# Altium PCB PCB1.PcbDoc
Units mm, origin at the board's own origin, x right, y up, seen from the top; angles counter-clockwise.
Board outline 42.8 x 28.32 mm, 2 copper layers (Top Layer, Bottom Layer); 17 components, 13 nets, 114 pads, 11 vias.
Unrouted connection lines stored in the file: 14.
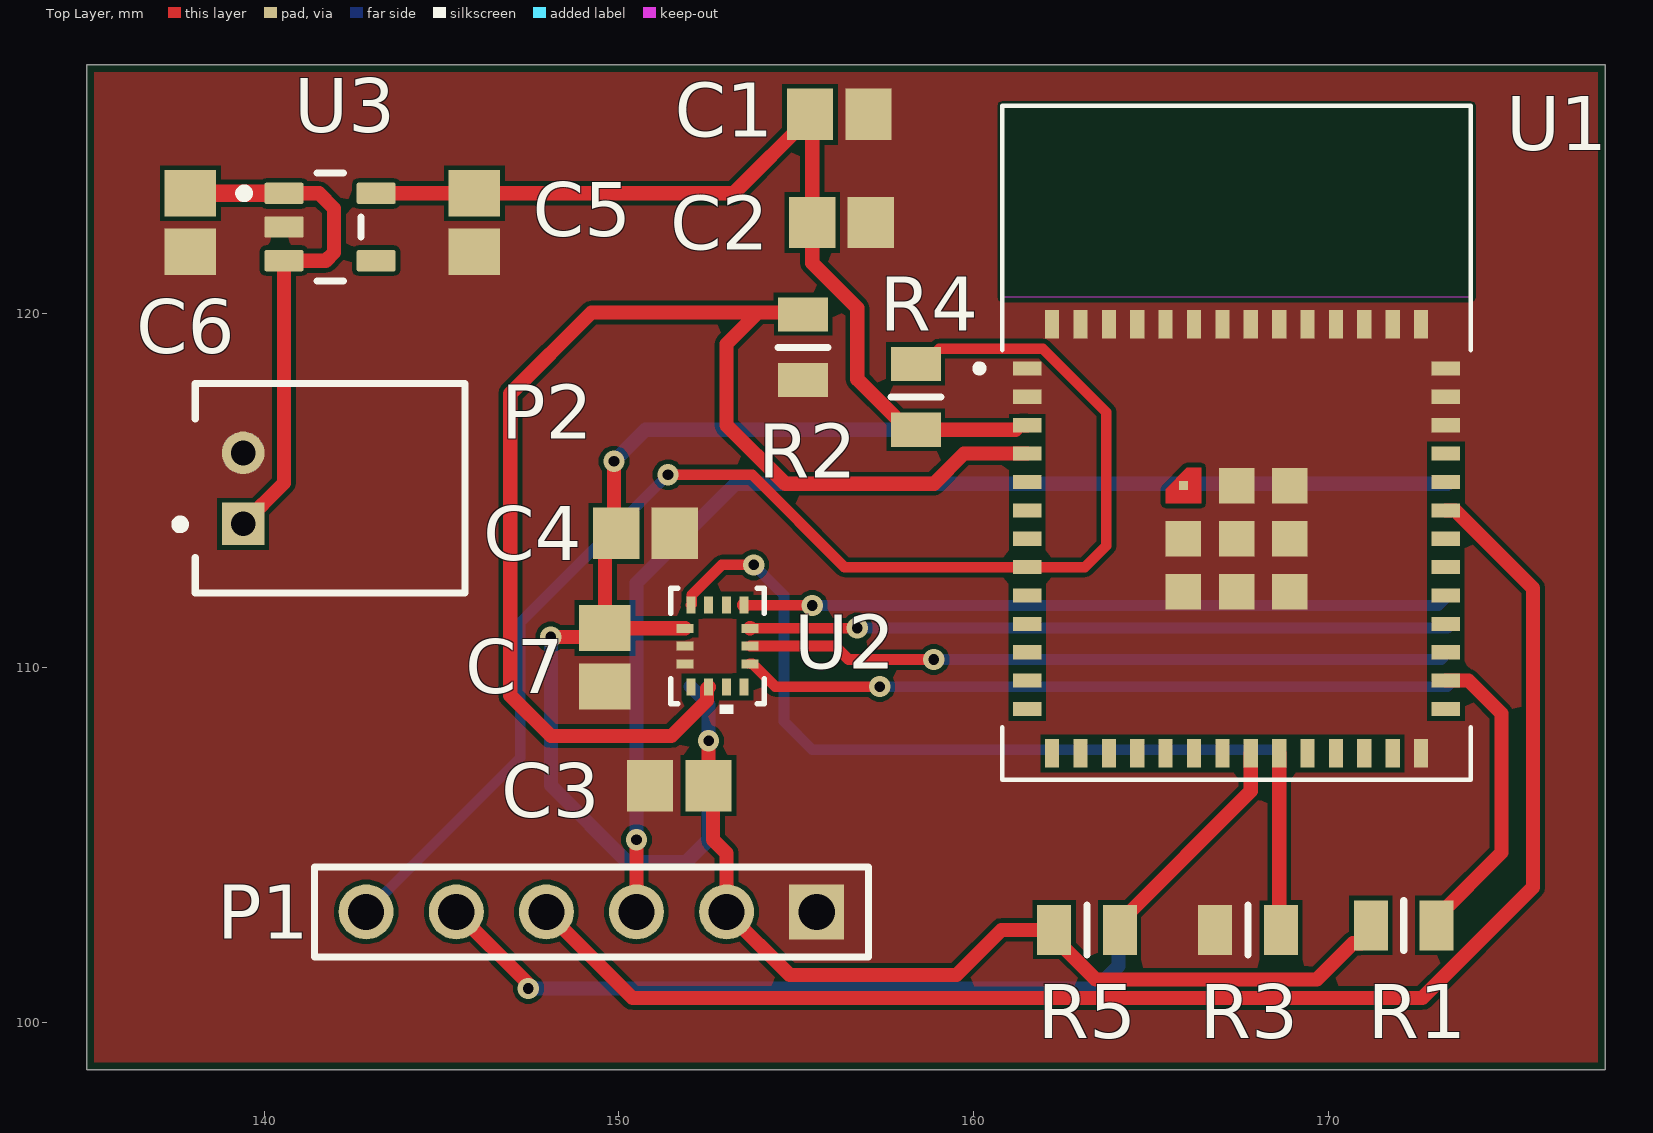
[diagram p0: Top Layer view]
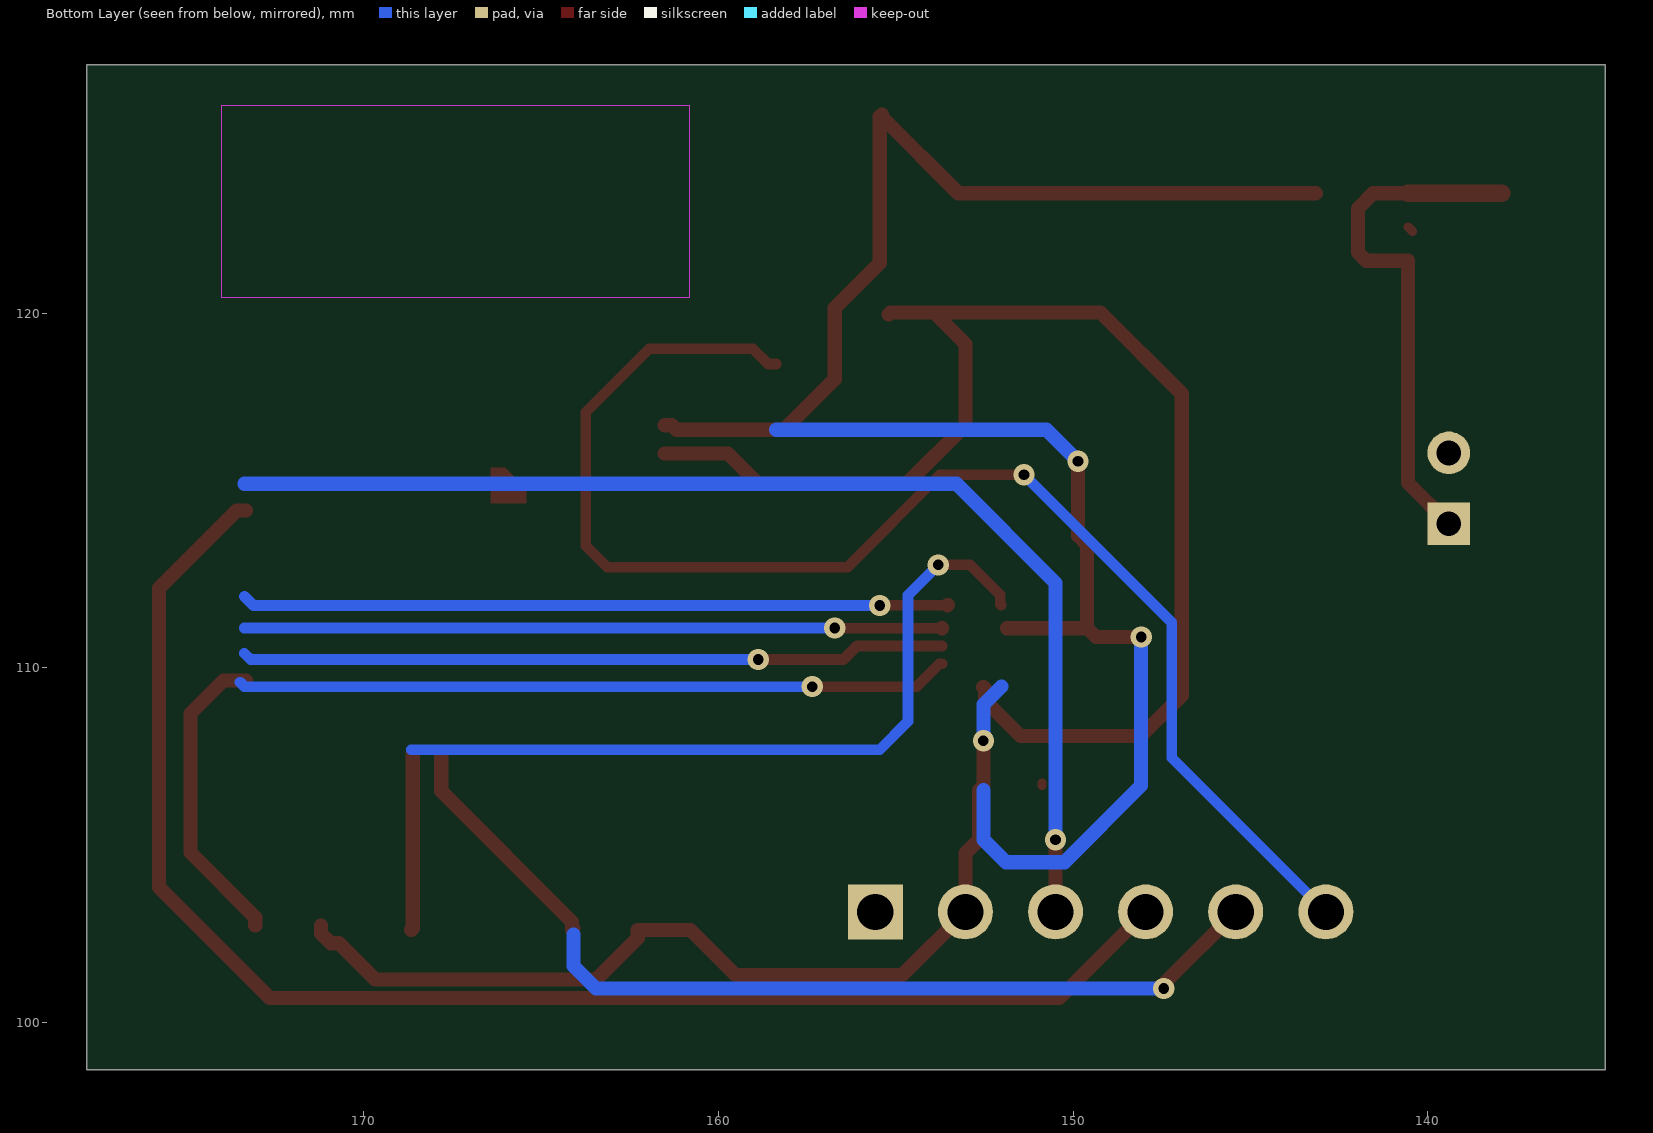
[diagram p1: Bottom Layer view, seen from below]
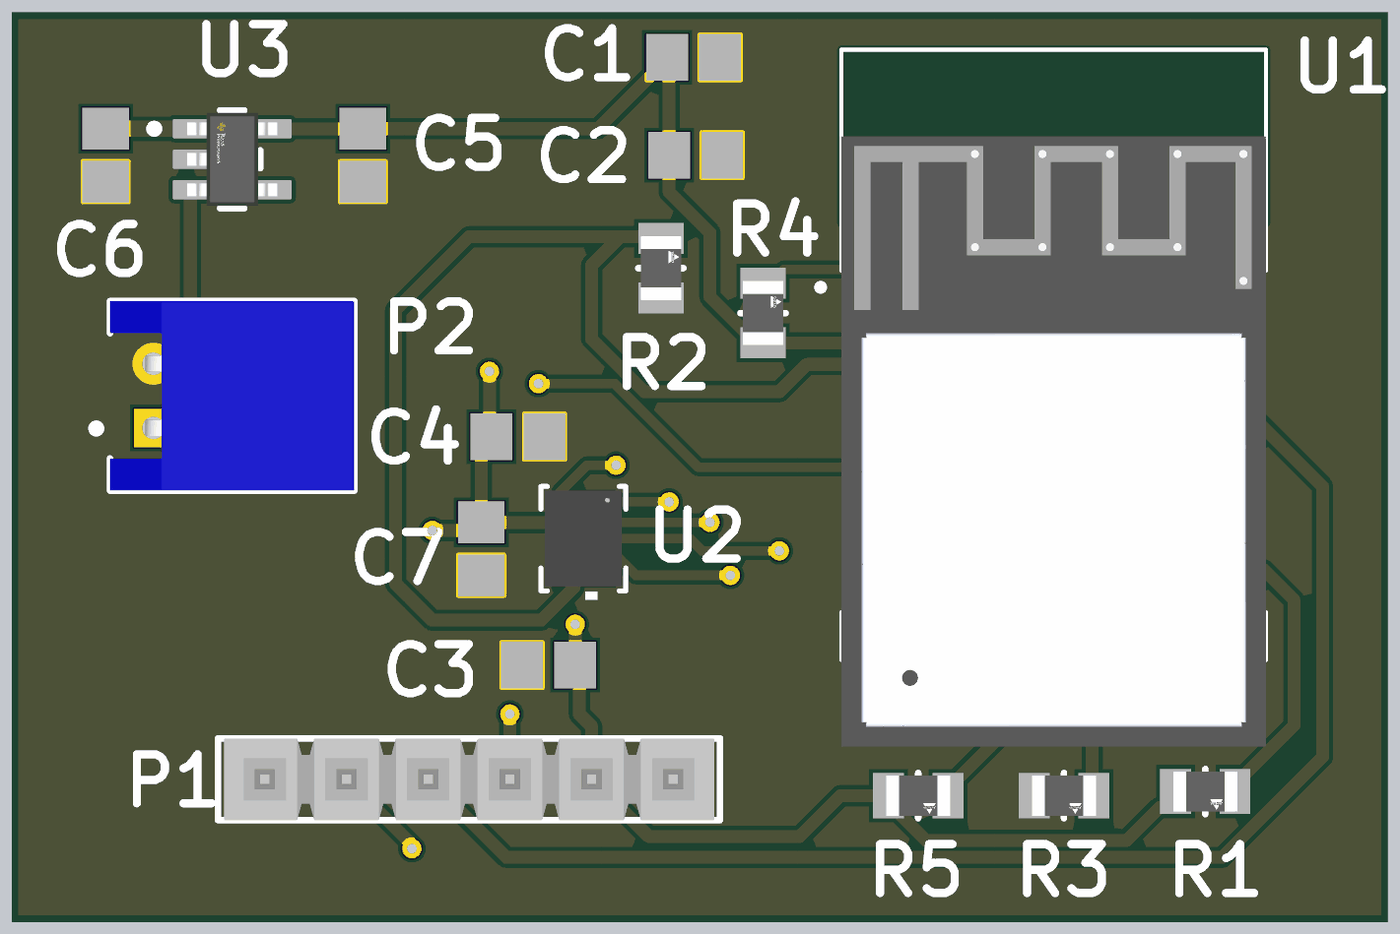
[diagram p2: 3D render of the assembled board from above, using the file's embedded part models]

## Layer stack, top to bottom
Top Solder: solder mask 0.0102, Solder Resist, Dk 3.5
Top Layer: signal copper 0.0356
Dielectric 1: dielectric 0.32, FR-4, Dk 4.8
Bottom Layer: signal copper 0.0356
Bottom Solder: solder mask 0.0102, Solder Resist, Dk 3.5

## Board outline
135.001,98.679 177.8,98.679 177.8,127 135.001,127

## Design rules (kind name [scope] priority, off if disabled: settings)
BoardOutlineClearance [All] p1: gap=0.2 ignorepadtopadclearanceinfootprint=FALSE
Clearance [All] p1: gap=0.127 ignorepadtopadclearanceinfootprint=TRUE except(0.254: Arc-Hole Track-Hole SMDPad-Hole THPad-Hole Via-Hole Fill-Hole Poly-Hole Region-Hole Text-Hole)
ComponentClearance [All] p1: gap=0.127 collisioncheckmode=3 verticalgap=0.127 showdistances=TRUE
DiffPairsRouting [All] p1: maxlimit=0.254 minlimit=0.127 mostfreqgap=0.127 toplayer_minwidth=0.127 toplayer_maxwidth=25.4 toplayer_prefwidth=0.127 bottomlayer_minwidth=0.127 bottomlayer_maxwidth=25.4 bottomlayer_prefwidth=0.127 maxuncoupledlength=12.7
Height [All] p1: minheight=0 maxheight=1816.048 prefheight=12.7
HoleSize [All] p1: absolutevalues=TRUE maxlimit=6.3 minlimit=0.3 maxpercent=80.000 minpercent=20.000
HoleToHoleClearance [All] p1: gap=0.254 allowstackedmicrovias=FALSE
MinimumAnnularRing [All] p1: minimumring=0.152
MinimumSolderMaskSliver [All] p1: minsoldermaskwidth=0.152
PlaneClearance [All] p1: clearance=0.127
PlaneConnect PlaneConnectPowerPads [InPadClass('PowerPads')] p1: planeconnectstyle=Direct reliefexpansion=0.508 reliefentries=4 reliefconductorwidth=0.254 reliefairgap=0.254
PlaneConnect [All] p2: pad.planeconnectstyle=Relief pad.reliefexpansion=0.3 pad.reliefentries=4 pad.reliefconductorwidth=0.127 pad.reliefairgap=0.127 via.planeconnectstyle=Direct via.reliefexpansion=0.3 via.reliefentries=4 via.reliefconductorwidth=0.127 via.reliefairgap=0.127
PolygonConnect PolygonConnectPowerPads [All vs (InPadClass('PowerPads'))] p1: connectstyle=Direct reliefconductorwidth=0.254 reliefentries=4 polygonreliefangle="90 Angle" airgapwidth=0.254
PolygonConnect [All] p2: connectstyle=Direct reliefconductorwidth=0.127 reliefentries=4 polygonreliefangle="90 Angle" airgapwidth=0.127
RoutingVias [All] p1: holewidth=0.3 width=0.6 viastyle="Through Hole" minholewidth=0.3 minwidth=0.6 maxholewidth=0.6 maxwidth=6.6
SilkToSilkClearance [All] p1: silktosilkclearance=0.127
SilkToSolderMaskClearance [IsPad] p1: minsilkscreentomaskgap=0.127 clearancetoexposedcopper=TRUE
SolderMaskExpansion [All] p1: expansion=0.051 istentingtop=FALSE
UnRoutedNet [All] p1: checkbadconnections=TRUE
Width Width_10mil [All] p1: maxlimit=25.4 minlimit=0.254 preferedwidth=0.254 minimp=50.000000 maximp=50.000000 favimp=50.000000
Width Width_6mil [All] p2: maxlimit=25.4 minlimit=0.152 preferedwidth=0.152 minimp=50.000000 maximp=50.000000 favimp=50.000000
Width Power_20mil [All] p3: maxlimit=25.4 minlimit=0.508 preferedwidth=0.508 minimp=50.000000 maximp=50.000000 favimp=50.000000
Width Power_12mil [All] p4: maxlimit=25.4 minlimit=0.305 preferedwidth=0.305 minimp=50.000000 maximp=50.000000 favimp=50.000000
Width Width_5mil [All] p5: maxlimit=25.4 minlimit=0.127 preferedwidth=0.127 minimp=50.000000 maximp=50.000000 favimp=50.000000
19 further rules are at their usual default settings.

## Components (designator, comment, footprint, x,y, rotation, side; value= is the part's Value field where it differs from the comment)
C1 "10u" CAPC2013X145X48NL20T23 156.21,125.603 r0 top
C2 "100n" CAPC2013X145X48NL20T23 156.273,122.555 r0 top
C3 "100n" CAPC2013X145X48NL20T23 151.701,106.68 r180 top
C4 "10n" CAPC2013X145X48NL20T23 150.749,113.792 r0 top
C5 "1u" CAPC2013X145X48NL20T23 145.923,122.555 r270 top
C6 "1u" CAPC2013X145X48NL20T23 137.922,122.555 r270 top
C7 "100n" CAPC2013X145X48NL20T23 149.606,110.3 r270 top
P1 "TSW-106-23-G-S" SMTC-TSW-106-23-X-S 155.575,103.124 r180 top
P2 "S2B-PH-K-S(LF)(SN)" JST-S2B-PH-K-S_V 141.859,115.062 r90 top
R1 "10k" FP-MCU0805-IPC_B 172.123,102.743 r0 top
R2 "10k" FP-MCU0805-IPC_B 155.194,119.037 r90 top
R3 "10k" FP-MCU0805-IPC_B 167.729,102.616 r0 top
R4 "10k" FP-MCU0805-IPC_B 158.369,117.64 r90 top
R5 "10k" FP-MCU0805-IPC_B 163.195,102.616 r0 top
U1 "ESP32-MINI-1-N4" XCVR_ESP32-MINI-1-N4 167.41,113.641 r0 top
U2 "BMI323" BMI323_BOS 152.781,110.617 r270 top
U3 "TLV75533PDBVR" FP-DBV0005A-MFG 141.859,122.428 r0 top

## Footprints (in the part's own frame and the unit in brackets; to place one, negate y for a bottom-side part, rotate by r counter-clockwise, add the part's x,y. Pads: shape width x height; smd on the part's side, far side on the other; paste and mask are expansions set on the pad)
BMI323_BOS [mil]
  rect 19x10 smd paste+0 mask+0: 1(-45.5,29.53) 2(-45.5,9.84) 3(-45.5,-9.84) 4(-45.5,-29.53) 8(45.5,-29.53) 9(45.5,-9.84) 10(45.5,9.84) 11(45.5,29.53)
  rect 10x19 smd paste+0 mask+0: 5(-19.69,-36) 6(0,-36) 7(19.69,-36) 12(19.69,36) 13(0,36) 14(-19.69,36)
  silkscreen extent -64,-52 75,52, body extent -59,-47 59,47, height 34
CAPC2013X145X48NL20T23 [mm] "Chip Capacitor, 2-Leads, Body 2.00x1.25mm, IPC Medium Density"
  rect 1.3x1.45 smd: 1(-0.825,0) 2(0.825,0)
  body extent -1.1,-0.72 1.1,0.72, height 1.45
FP-DBV0005A-MFG [mm]
  rrect17% 1.1x0.6 smd paste+0 mask+0: 1(-1.3,0.95) 2(-1.3,0) 3(-1.3,-0.95) 4(1.3,-0.95) 5(1.3,0.95)
  silkscreen extent -2.55,-1.53 0.87,1.52, body extent -1.95,-1.78 1.95,1.78, height 0.25
FP-MCU0805-IPC_B [mm]
  rect 0.959x1.408 smd paste+0 mask+0: 1(-0.927,0) 2(0.927,0)
  silkscreen extent 0,-0.7 0,0.7, body extent -1.66,-0.95 1.66,0.95, height 0.25
JST-S2B-PH-K-S_V [mm] "THD, 2-Leads, Body 7.6x5.9mm, Pitch 2mm"
  rect 1.2x1.2 hole 0.7: 1(-1,2.45)
  round 1.2 hole 0.7: 2(1,2.45)
  silkscreen extent -2.95,-3.8 2.95,4.35, body extent -2.95,-3.8 2.95,3.8, height 4.8
SMTC-TSW-106-23-X-S [mm] ".025 SQ Post Terminal Strip Assembly, 1x6 Pins, Vertical, 2.54mm Pitch, Male"
  rect 1.55x1.55 hole 1.02: 1(0,0)
  round 1.55 hole 1.02: 2(2.54,0) 3(5.08,0) 4(7.62,0) 5(10.16,0) 6(12.7,0)
  silkscreen extent -1.46,-1.27 14.16,1.27, body extent -1.27,-1.27 13.97,1.27, height 8.38
XCVR_ESP32-MINI-1-N4 [mm]
  rect 0.8x0.4 smd: 1(-5.9,4.8) 2(-5.9,4) 3(-5.9,3.2) 4(-5.9,2.4) 5(-5.9,1.6) 6(-5.9,0.8) 7(-5.9,0) 8(-5.9,-0.8) 9(-5.9,-1.6) 10(-5.9,-2.4) 11(-5.9,-3.2) 12(-5.9,-4) 13(-5.9,-4.8) 28(5.9,-4.8) 29(5.9,-4) 30(5.9,-3.2) 31(5.9,-2.4) 32(5.9,-1.6) 33(5.9,-0.8) 34(5.9,0) 35(5.9,0.8) 36(5.9,1.6) 37(5.9,2.4) 38(5.9,3.2) 39(5.9,4) 40(5.9,4.8)
  rect 0.4x0.8 smd: 14(-5.2,-6.05) 15(-4.4,-6.05) 16(-3.6,-6.05) 17(-2.8,-6.05) 18(-2,-6.05) 19(-1.2,-6.05) 20(-0.4,-6.05) 21(0.4,-6.05) 22(1.2,-6.05) 23(2,-6.05) 24(2.8,-6.05) 25(3.6,-6.05) 26(4.4,-6.05) 27(5.2,-6.05) 41(5.2,6.05) 42(4.4,6.05) 43(3.6,6.05) 44(2.8,6.05) 45(2,6.05) 46(1.2,6.05) 47(0.4,6.05) 48(-0.4,6.05) 49(-1.2,6.05) 50(-2,6.05) 51(-2.8,6.05) 52(-3.6,6.05) 53(-4.4,6.05) 54(-5.2,6.05)
  rect 0.25x0.25 smd paste-1 mask+0: 55_1(-1.5,1.5)
  rect 1x1 smd: 55_2(0,1.5) 55_3(1.5,1.5) 55_4(-1.5,0) 55_5(0,0) 55_6(1.5,0) 55_7(-1.5,-1.5) 55_8(0,-1.5) 55_9(1.5,-1.5)
  Top Layer region: -1,1 -2,1 -2,1.4 -1.4,2 -1,2
  Keep-Out Layer region: 6.6,6.8 -6.6,6.8 -6.6,12.2 6.6,12.2
  silkscreen extent -7.35,-6.8 6.6,12.2, body extent -6.6,-9.5 6.6,9.5, height 2.55

## Part data
C1 C2 C3 C4 C5 C6 C7: library part CMP-2007-01790-1, Manufacturer=Vitramon, Part Number=VJ0805Y222JXAAC
P1: library part CMP-1024-00396-1, "0.025\" SQ Post Header, Through-hole, Vertical, -55 to 125 degC, 2.54 mm Pitch, 6-Pin, Male, RoHS", Manufacturer=Samtec, Temperature Range="-55 to 125 degC", ComponentLink1Description="Manufacturer URL", ComponentLink1URL=http://www.samtec.com, ComponentLink2Description=Datasheet, ComponentLink2URL=http://www.samtec.com/documents/webfiles/pdf/TSW_TH.PDF, ComponentLink3Description="Package Specification", ComponentLink3URL=http://www.samtec.com/documents/webfiles/cpdf/TSW-XXX-XX-XXX-X-XX-XXX-MKT.pdf, DatasheetVersion=F-214, Mounting Technology=Through-hole, Orientation=Vertical, PackageDescription=".025[0.64] SQ. Post Terminal Strip Assembly", PackageReference=TSW-106-23-X-S, PackageVersion="DM, 8/1988", PartNumber=TSW-106-23-G-S, Pitch="2.54 mm", RoHS=True
P2: library part CMP-1755-00004-1, "Male Header, Pitch 2 mm, 1 x 2 Position, Height 4.8 mm, Tail Length 3.4 mm, -25 to 85 degC, RoHS, Bulk", Capacitance="10 uF", Case\Package=Radial, Max Operating Temperature="85 degC", Min Operating Temperature="-40 degC", Package Quantity=200, Tolerance=20%, Voltage Rating="50 V", ComponentLink1Description=Datasheet, ComponentLink1URL=http://www.jst-mfg.com/product/pdf/eng/ePH.pdf, DatasheetVersion=Dec-12, Diameter="5 mm", Height="11 mm", Lead Pitch="2 mm", Length="11 mm", Mount="Through Hole", PackageDescription="Male Header, Pitch 2 mm, 1 x 2 Position, Height 4.8 mm, Tail Length 3.4 mm", PackageReference=S2B-PH-K-S, Packaging=Bulk, Pins=2, Radiation Hardening=No, REACH SVHC="No SVHC", RoHSCompliant=true, Voltage Rating (DC)="50 V"
R1: library part CMP-02407-001108-1, Case Code (Imperial)=0805, Case Code (Metric)=2012, Max Operating Temperature=155°C, Max Power Dissipation=200mW, Min Operating Temperature=-55°C, Package Quantity=1000, Resistance=51.1kR, Temperature Coefficient=25ppm/°C, Tolerance=0.1%, Voltage Rating=150V, Case/Package=0805, Composition="Thin Film", Features="Automotive AEC-Q200", Height=0.024inch, Length=0.079inch, Number of Terminations=2, Packaging="Tape and Reel", Power Rating=200mW, Termination=SMD/SMT, Weight=0.000162oz, Width=0.049inch
R2 R3 R4 R5: library part CMP-02407-001108-1, "RES 1.05K OHM 0.5% 1/5W 0805", Case Code (Imperial)=0805, Case Code (Metric)=2012, Max Operating Temperature=155°C, Max Power Dissipation=200mW, Min Operating Temperature=-55°C, Package Quantity=1000, Resistance=51.1kR, Temperature Coefficient=25ppm/°C, Tolerance=0.1%, Voltage Rating=150V, Case/Package=0805, Composition="Thin Film", Features="Automotive AEC-Q200", Height=0.024inch, Length=0.079inch, Number of Terminations=2, Packaging="Tape and Reel", Power Rating=200mW, Termination=SMD/SMT, Weight=0.000162oz, Width=0.049inch
U1: "Bluetooth, WiFi 802.11b/g/n, Bluetooth v4.2 +EDR, Class 1, 2 and 3 Transceiver Module 2.412GHz ~ 2.484GHz Integrated, Trace Chassis Mount", Package="Module Espressif Systems", Check_prices=https://www.snapeda.com/parts/ESP32-MINI-1-N4/Espressif+Systems/view-part/?ref=eda, MF="Espressif Systems", MP=ESP32-MINI-1-N4, SnapEDA_Link=https://www.snapeda.com/parts/ESP32-MINI-1-N4/Espressif+Systems/view-part/?ref=snap
U2: "Description", Manufacturer_Name="Bosch Sensortec", Copyright="Copyright (C) 2026 Ultra Librarian. All rights reserved.", Manufacturer_Part_Number=BMI323, RefDes=RefDes, Type=Type
U3: library part CMP-04917-000010-1, "IC REG LINEAR 3.3V 500MA SOT23-5", Ambient Temperature Range High=+70°C, Dropout Voltage=150mV, Manufacturer="Texas Instruments", Max Junction Temp=+125°C, Max Supply Voltage=5.5V, Min Supply Voltage=1.45V, Output Current=500mA, Output Voltage=3.3V, Package=DBV0005A, Temperature="-40°C to +125°C", Temperature Range Low=-40°C, Accuracy Percentage=1%, Automotive=No, Category=IC, ComponentLink2Description=Datasheet, ComponentLink2URL=http://www.ti.com/lit/ds/symlink/tlv755p.pdf, Device Class L1="Integrated Circuits (ICs)", Device Class L2="Power Management ICs", Device Class L3="Voltage Regulators - Linear", Digikey Description="IC REG LINEAR 3.3V 500MA SOT23-5", Height=1.45mm, Lead Free=Yes, Manufacturer Part Number=TLV75533PDBVR, Mouser Description="500-mA low-IQ small-size low-dropout (LDO) regulator 5-SOT-23 -40 to 125", Number Of Outputs=1, Octopart=https://octopart.com/tlv75533pdbvr-texas+instruments-91272349, Output Type=Fixed, RoHS=TRUE, Standoff Height=0mm, Temperature Range High=+125°C

## Via types
v1: diameter 0.6, hole 0.3, Top Layer to Bottom Layer, 11 vias

## Nets (pads, with @x,y where several pads share a name; then routed paths per layer and width w, separated by ;. In a path a pad name is that pad's centre, name@x,y a point inside that pad or via, vN(x,y) a via of type N, cw(c..) or ccw(c..) an arc to the next point about the centre after c; other vN are vias at no path point)
3V3: C1.1 C2.1 C3.1 C4.1 C5.1 C7.1 P1.2 R1.1 R4.1 R5.1 U1.3 U2.5 U2.8 U3.5 | length 83.1
  Top Layer w0.4: U3.5 145.921,123.378 C5.1 153.237,123.38 155.385,125.528 C1.1 155.448,125.54 C2.1 155.448,121.412 156.718,120.142 156.718,118.139 158.144,116.713 R4.1 161.182,116.713 161.31,116.841 U1.3 ; v1(148.082,110.871) 149.352,110.871 C7.1 ; v1(149.86,115.824) 149.86,113.728 149.606,113.474 C7.1 ; U2.5 149.614,111.117 C7.1 ; v1(152.527,107.95) C3.1 C3.1 152.654,106.552 152.654,105.156 153.035,104.775 P1.2 154.813,101.346 159.512,101.346 160.782,102.616 R5.1 162.268,102.391 163.441,101.219 169.672,101.219 170.692,102.239 170.917,102.239 171.196,102.518 R1.1
  Bottom Layer w0.4: v1(148.082,110.871) 148.082,106.682 150.243,104.521 151.892,104.521 152.527,105.156 152.527,106.553 ; v1(149.86,115.824) 150.749,116.713 158.369,116.713 ; 152.019,109.474 152.527,108.966 v1(152.527,107.95)
CS: R1.2 U1.29 U2.12 | length 28.8
  Top Layer w0.3: U2.12 153.764,110.117 154.407,109.474 v1(157.353,109.474)
  Top Layer w0.4: R1.2 173.049,102.968 174.879,104.797 174.879,108.712 173.95,109.641 U1.29
  Bottom Layer w0.3: v1(157.353,109.474) 173.355,109.474 173.482,109.601
EN: P1.6 R4.2 U1.8 | length 39.6
  Top Layer w0.3: v1(151.384,115.443) 153.757,115.443 156.359,112.841 U1.8 163.133,112.841 163.739,113.447 163.739,117.204 161.944,118.999 159.026,118.999 158.594,118.566 R4.2
  Bottom Layer w0.3: P1.6 147.22,107.469 147.22,111.279 v1(151.384,115.443)
GND: C1.2 C2.2 C3.2 C4.2 C5.2 C6.2 C7.2 P1.1 P2.2 R2.1 R3.1 U1.1 U1.2 U1.27 U1.38 U1.39 U1.40 U1.41 U1.42 U1.43 U1.44 U1.45 U1.46 U1.47 U1.48 U1.49 U1.50 U1.51 U1.52 U1.53 U1.54 U1.55_1 U1.55_2 U1.55_3 U1.55_4 U1.55_5 U1.55_6 U1.55_7 U1.55_8 U1.55_9 U2.6 U2.7 U3.2 | length 0.3
  Top Layer w0.254: P2.2 P2.2@139.446,116.099 ; U3.2@140.432,122.301 U3.2 ; C3.2 C3.2@150.876,106.755
INT1: R3.2 U1.22 U2.4 | length 26.5
  Top Layer w0.3: U2.4 152.054,111.796 152.054,112.056 152.901,112.903 v1(153.797,112.903)
  Top Layer w0.4: U1.22 168.61,102.662 R3.2
  Bottom Layer w0.3: v1(153.797,112.903) 154.651,112.049 154.651,108.493 155.448,107.696 168.656,107.696
INT2: R2.2 U1.4 U2.9 | length 37.6
  Top Layer w0.4: U2.9 152.526,109.461 152.485,109.42 152.485,109.085 151.477,108.077 148.082,108.077 146.939,109.22 146.939,117.729 149.225,120.015 155.142,120.015 R2.2 ; 153.924,120.015 153.035,119.126 153.035,116.84 154.686,115.189 158.877,115.189 159.729,116.041 U1.4
IO0: P1.5 R5.2 U1.21 | length 27.3
  Top Layer w0.4: P1.5 147.409,101.13 147.409,101.003 v1(147.447,100.965) ; R5.2@164.084,102.654 R5.2 164.122,102.841 167.81,106.529 U1.21
  Bottom Layer w0.4: v1(147.447,100.965) 163.449,100.965 164.084,101.6 164.084,102.489
MISO: U1.32 U2.1 | length 19.9
  Top Layer w0.3: U2.1@153.537,111.766 v1@155.442,111.766
  Top Layer w0.4: U2.1 U2.1@153.537,111.766 ; v1@155.442,111.766 v1(155.448,111.76)
  Bottom Layer w0.3: v1(155.448,111.76) 173.101,111.76 173.355,112.014
MOSI: U1.31 U2.14 | length 19.7
  Top Layer w0.3: U2.14@153.699,111.121 v1@156.714,111.121
  Top Layer w0.4: U2.14 U2.14@153.699,111.121 ; v1@156.714,111.121 v1(156.718,111.125)
  Bottom Layer w0.3: v1(156.718,111.125) 173.362,111.125
RX: P1.4 U1.35 | length 41.9
  Top Layer w0.4: P1.4 150.387,100.692 172.644,100.692 175.768,103.816 175.768,112.245 173.572,114.441 U1.35
SCK: U1.30 U2.13 | length 19.9
  Top Layer w0.3: U2.13 156.089,110.617 156.47,110.236 v1(158.877,110.236)
  Bottom Layer w0.3: v1(158.877,110.236) 173.183,110.236 173.364,110.417
TX: P1.3 U1.36 | length 33.3
  Top Layer w0.4: P1.3 v1(150.495,105.156)
  Bottom Layer w0.4: v1(150.495,105.156) 150.495,112.395 153.289,115.189 173.355,115.189
VBAT: C6.1 P2.1 U3.1 U3.3 | length 14.9
  Top Layer w0.4: C6.1 C6.1@137.924,123.378 ; P2.1 140.559,115.212 U3.3 141.736,121.478 141.97,121.712 141.97,122.952 141.544,123.378 U3.1
  Top Layer w0.5: C6.1@137.924,123.378 U3.1
pads on no net: U1.5 U1.6 U1.7 U1.9 U1.10 U1.11 U1.12 U1.13 U1.14 U1.15 U1.16 U1.17 U1.18 U1.19 U1.20 U1.23 U1.24 U1.25 U1.26 U1.28 U1.33 U1.34 U1.37 U2.2 U2.3 U2.10 U2.11 U3.4

## Polygon pours and split planes (outlines as drawn)
GND on Top Layer "GND_L01_P000" (solid, pour order 0): 135.001,127 177.8,127 177.8,98.679 135.128,98.679 135.001,98.679

## Text inside footprints (layer, text, board x,y; h text height)
U2: Mechanical 13 "*" at 153.146,111.849 h1.27 r270